# EAGLE board Board (EAGLE 9.6.2)
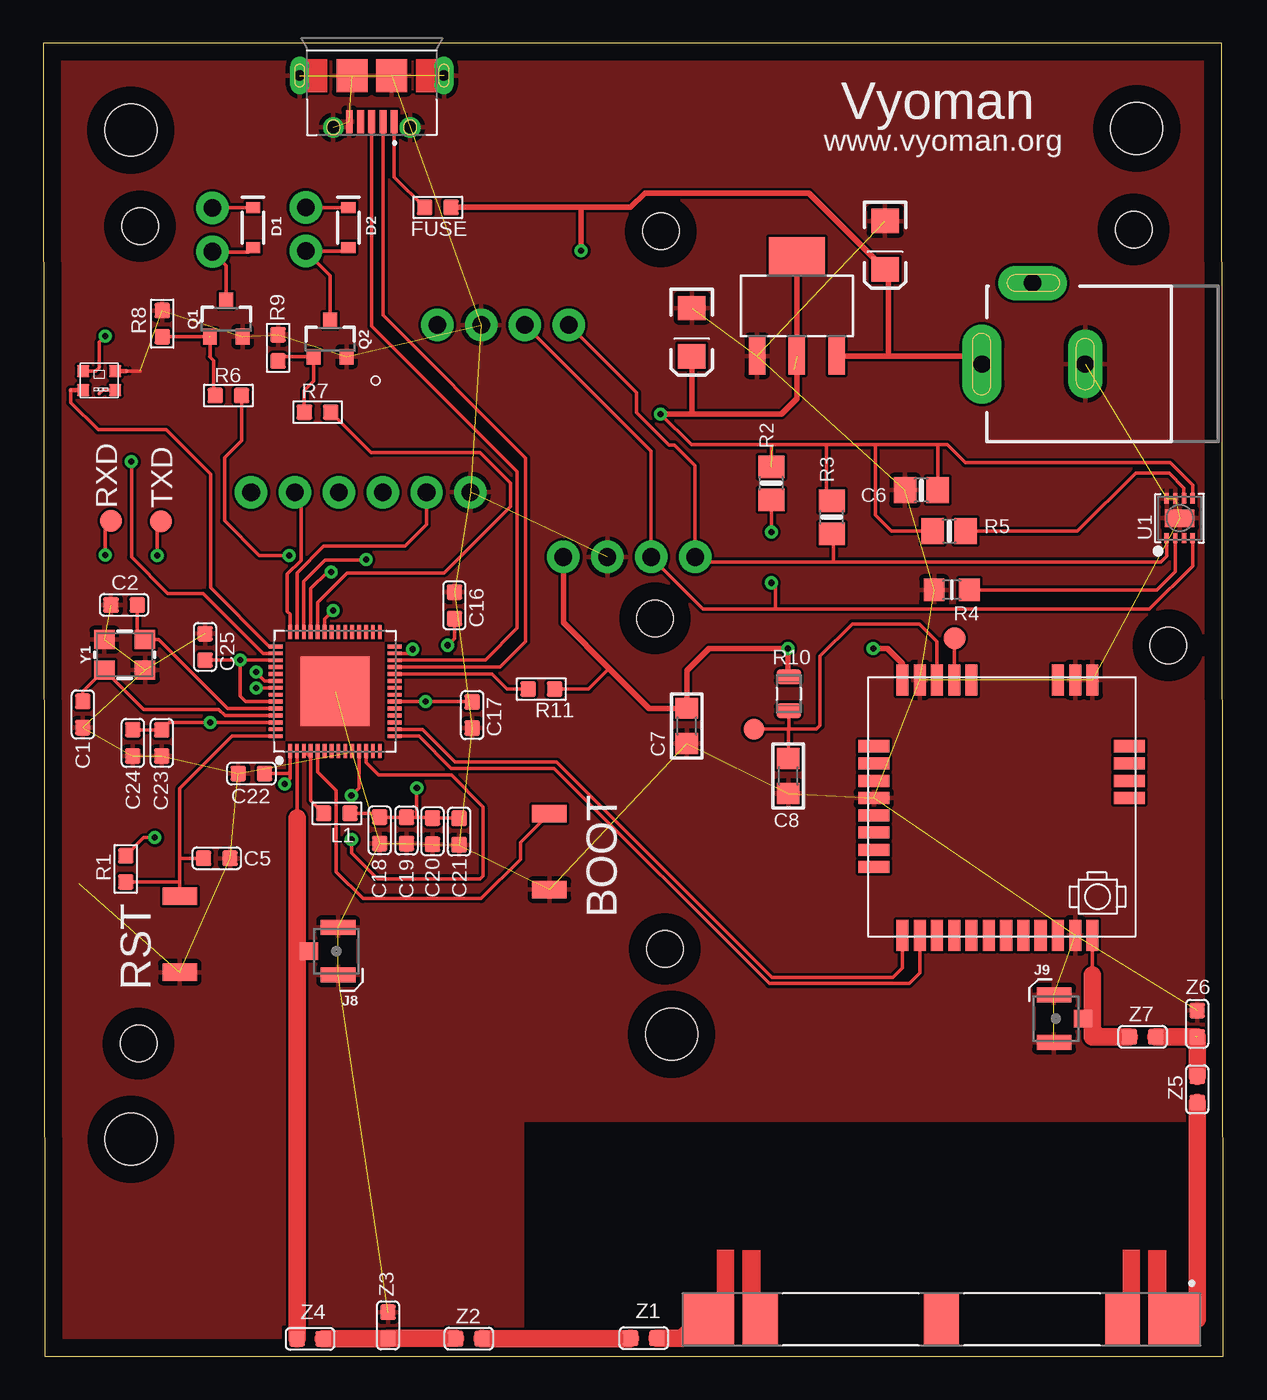
[diagram p0: board, top side]
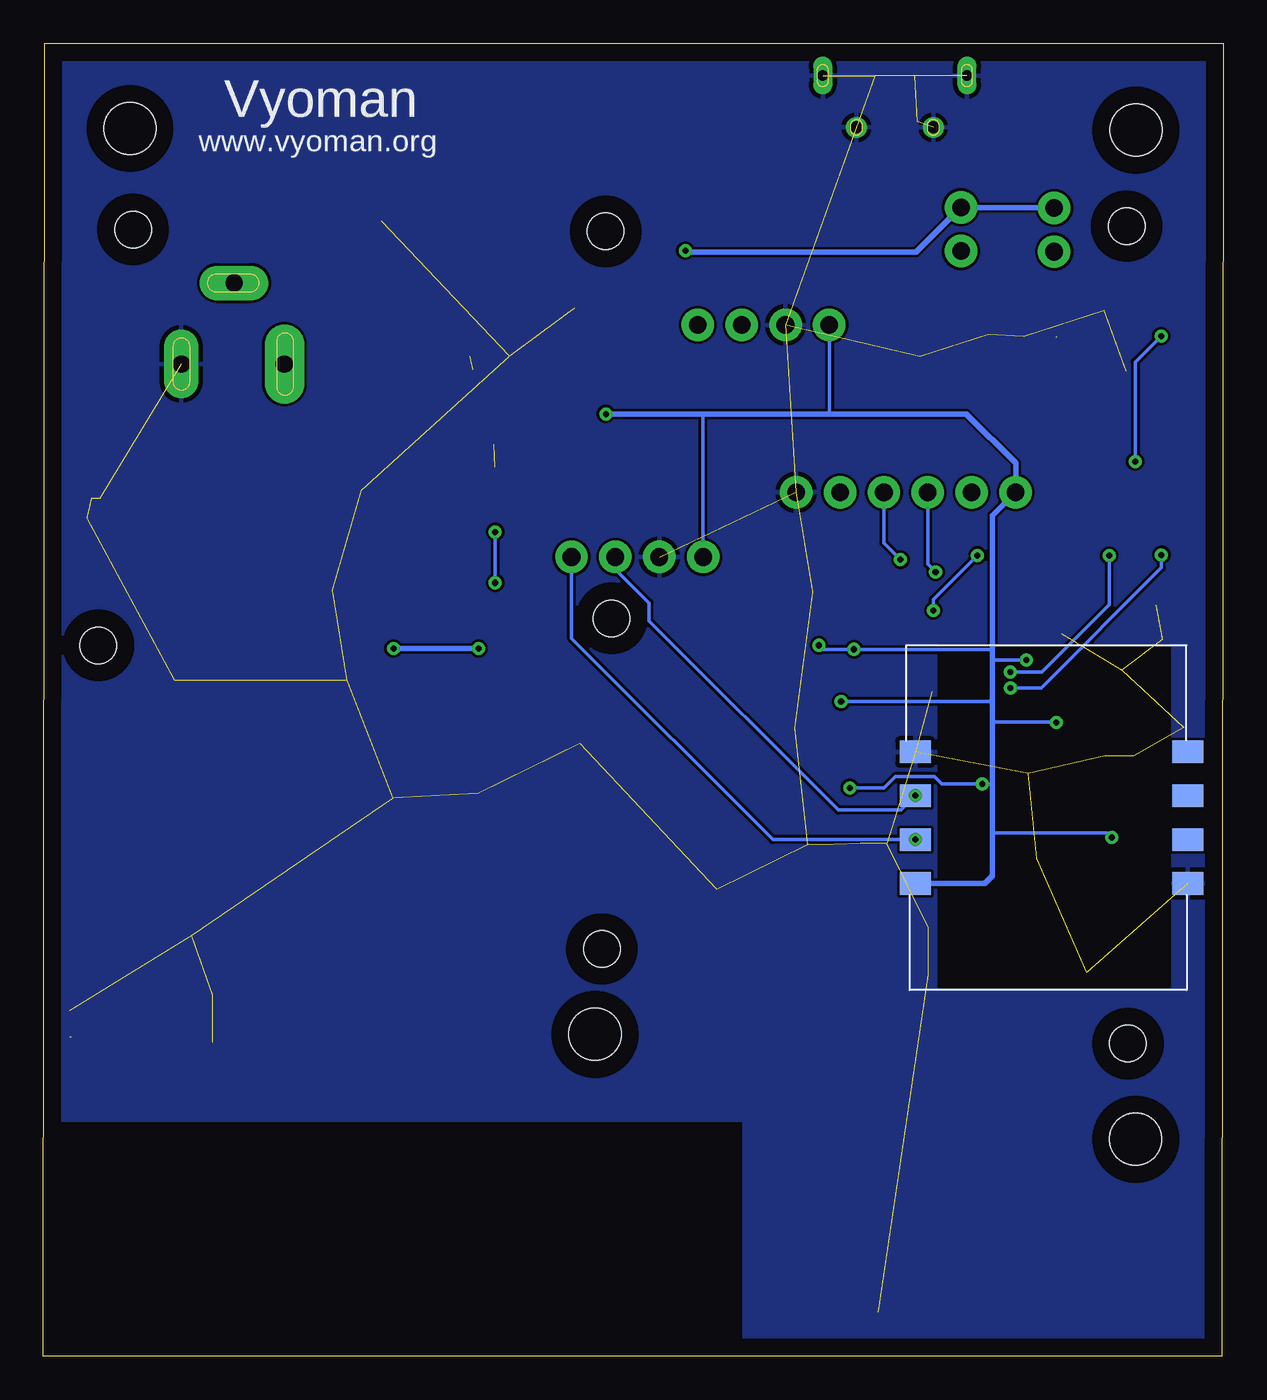
[diagram p1: board, bottom side, seen from below]

Size 68.35 x 76.04 mm. Coordinates in mm from the lower left corner, seen from the top.
Outline: 0.1,0 68.35,0 68.25,76.04 0,76.04 0.1,0
Copper layers (1*16): Top 0.035mm / dielectric 1.5mm / Bottom 0.035mm
Design rules "default": minimum track width 6mil, minimum drill 0.35mm, track to track 6mil, track to pad 6mil, pad to pad 6mil, via to via 6mil, smd to smd 6mil, copper to edge 40mil, drill to drill 6mil, minimum pad ring 10mil, minimum via ring 8mil, stop-mask expansion 4mil, vias tented up to drill 0mil, thermal gap 10mil
Net classes: 0 Default: width 0.203 mm; 2 3.3V: width 0.305 mm
Holes 3 mm at 5.08,12.57 36.39,18.65 5.07,71.01 63.33,71.11
Holes 2.1 mm at 5.53,18.12 63.15,65.26 5.61,65.45 35.77,65.15 35.43,42.73 36,23.59 65.16,41.18
tRestrict: area 13.9,0.4 to 16.7,1.7; area 23.3,0.4 to 26.1,1.7; area 66.2,14.1 to 67.5,16.9; area 62.3,17.9 to 65.1,19.1
bRestrict: area 3.1,21.4 to 16.5,41.2

## Footprints (pad centres in the part's own frame; a part is rotated, then mirrored left to right if it is on the bottom)
C0603 = smd 0.889 x 0.889: 1 -0.762,0; 2 0.762,0
EIA3216 = smd 1.4 x 1.6: A 1.4,0; C -1.4,0
0805-NO = smd 1.3 x 1.5: 1 -0.95,0; 2 0.95,0
C0805 = smd 1.2 x 1.3: 1 -1.016,0; 2 1.016,0
SOD-323 = smd 0.63 x 0.83: A 1.15,0; C -1.15,0
XCVR_NN03-310 = smd 3 x 3: 1_2 -13.5,0; 6_7 13.5,0 | smd 2 x 3: 3 -10.5,0; 4 0,0; 5 10.5,0
R0603 = smd 0.889 x 0.889: 1 -0.762,0; 2 0.762,0
SOT223 = smd 0.95 x 2.15: 1 -2.3,-2.9; 2 0,-2.9; 3 2.3,-2.9 | smd 3.25 x 2.15: 4 0,2.9
1X04_NO_SILK = drill 1.016 pad 1.88: 1 0,0; 2 2.54,0; 3 5.08,0; 4 7.62,0
MOLEX_47589-0001 = smd 0.4 x 1.35: 1 -1.3,1.938; 2 -0.65,1.938; 3 0,1.938; 4 0.65,1.938; 5 1.3,1.938 | drill 0.6 pad 0.95 long: S1 -4.175,-0.738; S4 4.175,-0.738 | smd 1.8 x 1.9: S2 -1.15,-0.738; S3 1.15,-0.738 | drill 0.7 pad 1.1: S5 -2.225,2.263; S6 2.225,2.263
POWER_JACK_PTH_SLOT = drill 1 pad 2 long: GND 0,0; GNDBREAK -3.048,4.699 | drill 1 pad 2.3 long: PWR -5.969,0
1X02_NO_SILK = drill 1.016 pad 1.88: 1 0,0; 2 2.54,0
1X06_NO_SILK = drill 1.016 pad 1.88: 1 0,0; 2 2.54,0; 3 5.08,0; 4 7.62,0; 5 10.16,0; 6 12.7,0
U.FL_REDUCED_FOOTPRINT = smd 2 x 0.85: 1 -0.1,1.375; 2 -0.1,-1.375 | smd 1.05 x 1: FEED 1.575,0
SOT23-3 = smd 0.8 x 0.9: 1 -0.95,-1; 2 0.95,-1; 3 0,1.1
_0805MP = smd 1.2 x 1.3: 1 -1.016,0; 2 1.016,0
RES_0805 = smd 0.87 x 1.42: 1 -0.975,0; 2 0.975,0
PAD.03X.05 = smd 1.27 x 1.27: P$1 0,0
TP12R = smd 1.2 x 1.2: TP 0,0
SHT3X = smd 0.6 x 0.25: 1 -1.15,0.75; 2 -1.15,0.25; 3 -1.15,-0.25; 4 -1.15,-0.75; 5 1.15,-0.75; 6 1.15,-0.25; 7 1.15,0.25; 8 1.15,0.75 | smd 1 x 1.7: THERMAL 0,0
LED-WS2812B-2020-RING = smd 0.127 x 0.127: + -17.655,-0.55; DI -16,0.75; DO -16.005,-0.75; GND -14.405,0.55 | smd 0.7 x 0.7: +1 -16.925,-0.55; DI1 -16.925,0.55; DO1 -15.075,-0.55; GND1 -15.075,0.55
TACTILE = smd 1 x 2: PINS1 1.82,1.437; PINS2 6.22,1.437
MAX30102 = smd 1.8 x 1.31: GND 1.27,10.16; GND1 17.06,2.54; INT 1.27,2.54; IRQ 1.27,5.08; RD 1.27,7.62; SCL 17.06,5.08; SDA 17.06,7.62; VIN 17.06,10.16
RAK3172 = smd 0.7 x 1.8: 1 13.5,14.945; 2 12.5,14.945; 3 11.5,14.945; 4 10.5,14.945; 5 9.5,14.945; 6 8.5,14.945; 7 7.5,14.945; 8 6.5,14.945; 9 5.5,14.945; 10 4.5,14.945; 11 3.5,14.945; 12 2.5,14.945; 17 2.5,0.145; 18 3.5,0.145; 19 4.5,0.145; 20 9.5,0.145; 21 10.5,0.145; 22 11.5,0.145; 23 12.5,0.145; 24 13.5,0.145 | smd 1.8 x 0.7: 13 0.365,6.99; 14 0.365,5.99; 15 0.365,4.99; 16 0.365,3.99; 25 15.165,3.99; 26 15.165,4.99; 27 15.165,5.99; 28 15.165,6.99; 29 15.165,7.99; 30 15.165,8.99; 31 15.165,9.99; 32 15.165,10.99
QFN40P700X700X90-57T400N = smd 0.81 x 0.22: 1 -3.445,2.6; 2 -3.445,2.2; 3 -3.445,1.8; 4 -3.445,1.4; 5 -3.445,1; 6 -3.445,0.6; 7 -3.445,0.2; 8 -3.445,-0.2; 9 -3.445,-0.6; 10 -3.445,-1; 11 -3.445,-1.4; 12 -3.445,-1.8; 13 -3.445,-2.2; 14 -3.445,-2.6; 29 3.445,-2.6; 30 3.445,-2.2; 31 3.445,-1.8; 32 3.445,-1.4; 33 3.445,-1; 34 3.445,-0.6; 35 3.445,-0.2; 36 3.445,0.2; 37 3.445,0.6; 38 3.445,1; 39 3.445,1.4; 40 3.445,1.8; 41 3.445,2.2; 42 3.445,2.6 | smd 0.22 x 0.81: 15 -2.6,-3.445; 16 -2.2,-3.445; 17 -1.8,-3.445; 18 -1.4,-3.445; 19 -1,-3.445; 20 -0.6,-3.445; 21 -0.2,-3.445; 22 0.2,-3.445; 23 0.6,-3.445; 24 1,-3.445; 25 1.4,-3.445; 26 1.8,-3.445; 27 2.2,-3.445; 28 2.6,-3.445; 43 2.6,3.445; 44 2.2,3.445; 45 1.8,3.445; 46 1.4,3.445; 47 1,3.445; 48 0.6,3.445; 49 0.2,3.445; 50 -0.2,3.445; 51 -0.6,3.445; 52 -1,3.445; 53 -1.4,3.445; 54 -1.8,3.445; 55 -2.2,3.445; 56 -2.6,3.445 | smd 4 x 4: 57 0,0
CRYSTAL-SMD-3.2X2.5MM = smd 1.2 x 1.1: 1 -1.175,-0.875; 2 1.175,-0.875; 3 1.175,0.875; 4 -1.175,0.875

## Placement (x,y rotation side)
C1  16pF  [C0603]  2.3,37.17 270 top
C2  16pF  [C0603]  4.69,43.52 0 top
C3  47uF  [EIA3216]  48.76,64.35 270 top
C4  47uF  [EIA3216]  37.57,59.31 270 top
C5  1uF  [C0603]  10.05,28.84 180 top
C6  10uF  [0805-NO]  50.86,50.16 180 top
C7  [C0805]  37.27,36.51 90 top
C8  [C0805]  43.15,33.61 90 top
C16  0.1uF  [C0603]  23.81,43.49 270 top
C17  1uF  [C0603]  24.85,37.14 90 top
C18  0.1uF  [C0603]  19.49,30.46 90 top
C19  0.1uF  [C0603]  21.04,30.45 90 top
C20  1uF  [C0603]  22.54,30.41 90 top
C21  10uF  [C0603]  24.09,30.39 90 top
C22  0.1uF  [C0603]  12.06,33.74 0 top
C23  1uF  [C0603]  6.87,35.52 90 top
C24  100pF  [C0603]  5.19,35.52 90 top
C25  0.1uF  [C0603]  9.37,41.08 270 top
D1  BAT760  [SOD-323]  12.16,65.36 270 top
D2  BAT760  [SOD-323]  17.68,65.36 270 top
E1  NN03-310  [XCVR_NN03-310]  52.02,2.14 180 top
FUSE  2.0K  [R0603]  22.85,66.53 0 top
IC1  LM1117MP-3.3  [SOT223]  43.65,60.83 0 top
J1  [1X04_NO_SILK]  22.82,59.72 0 top
J2  47589-0001  [MOLEX_47589-0001]  19.03,73.43 180 top
J3  POWER_JACKPOWER_JACK_SLOT  [POWER_JACK_PTH_SLOT]  60.34,57.46 0 top
J4  [1X04_NO_SILK]  30.13,46.29 0 top
J5  [1X02_NO_SILK]  9.8,63.97 90 top
J6  [1X02_NO_SILK]  15.2,64 90 top
J7  [1X06_NO_SILK]  12.04,50.04 0 top
J8  [U.FL_REDUCED_FOOTPRINT]  16.98,23.46 180 top
J9  [U.FL_REDUCED_FOOTPRINT]  58.64,19.56 0 top
L1  2.0nH  [R0603]  17.01,31.44 0 top
Q1  500mA/300V  [SOT23-3]  10.61,60.05 0 top
Q2  500mA/300V  [SOT23-3]  16.62,58.89 0 top
R1  10K  [R0603]  4.78,28.23 90 top
R2  10K  [0805-NO]  42.17,50.56 90 top
R3  10K  [0805-NO]  45.67,48.59 90 top
R4  10K  [_0805MP]  52.62,44.38 180 top
R5  10K  [0805-NO]  52.47,47.79 0 top
R6  10K  [R0603]  10.72,55.65 0 top
R7  10K  [R0603]  15.89,54.68 0 top
R8  10K  [R0603]  6.9,59.8 90 top
R9  10K  [R0603]  13.6,58.4 90 top
R10  CRCW08050000Z0EA  [RES_0805]  43.18,38.37 270 top
R11  10K  [R0603]  28.85,38.64 180 top
TP1  TEST-POINT3X5  [PAD.03X.05]  3.93,48.39 0 top
TP2  TEST-POINT3X5  [PAD.03X.05]  6.81,48.35 0 top
TP3  TEST-POINT3X5  [PAD.03X.05]  52.78,41.59 0 top
TP4  TPTP12R  [TP12R]  41.16,36.31 0 top
U1  SHT31-DIS  [SHT3X]  65.81,48.53 90 top
U4  LED-ADDRESSABLE16MM  [LED-WS2812B-2020-RING]  19.25,56.51 0 top
U$1  TACTILE  [TACTILE]  9.35,20.43 90 top
U$2  TACTILE  [TACTILE]  30.76,25.21 90 top
U$3  MAX30102_BREAKOUT  [MAX30102]  0.79,37.55 180 bottom
U$4  RAK3172HF  [RAK3172]  63.26,39.32 180 top
U$15  ESP32-S2QFN54  [QFN40P700X700X90-57T400N]  16.9,38.51 90 top
Y1  CRYSTAL-GROUNDEDSMD-3.2X2.5  [CRYSTAL-SMD-3.2X2.5MM]  4.72,40.63 0 top
Z1  0.1pF  [C0603]  34.79,1.06 0 top
Z2  0.7pF  [C0603]  24.65,1.03 0 top
Z3  4.9nH  [C0603]  19.97,1.79 90 top
Z4  0.2pF  [C0603]  15.46,1.01 180 top
Z5  11nH  [C0603]  66.84,15.46 90 top
Z6  5nH  [C0603]  66.83,19.26 270 top
Z7  3.9nH  [C0603]  63.67,18.5 0 top

## Library data of the parts
C1 C2 C5 C16-C25 FUSE L1 R1 R6-R9 R11 U$4 Z1-Z7 = RAK3172-Breakout
C3 C4 = SparkFun-Retired; PROD_ID: CAP-00811
C6 R2-R5 U1 = microbuilder
C7 C8 = rc-master-smd
D1 D2 = SparkFun-DiscreteSemi; PROD_ID: DIO-14072
E1 = NN03-310; AVAILABILITY: In Stock; DESCRIPTION: Multiport top performance chip antenna component for GSM, UMTS, LTE, 5G, GNSS, Bluetooth (617 - 960MHz, 1710 - 2690MHz, 3300 - 3800MHz, 1561 - 1606 MHz and 2400 - 2500 MHz), signal booster; MF: Ignion; MP: NN03-310; PACKAGE: None; PRICE: None; PURCHASE-URL: https://pricing.snapeda.com/search/part/NN03-310/?ref=eda
IC1 = lm1117_10; MF: Texas Instruments; MPN: LM1117MP-3.3; OC_FARNELL: 9778195; OC_NEWARK: 28X3416
J1 J4 = SparkFun-Connectors; PROD_ID: CONN-09696
J2 = 47589-0001; AVAILABILITY: In Stock; DESCRIPTION: USB - micro AB Receptacle Connector 5 Position Surface Mount, Right Angle; Through Hole; MF: Molex; MP: 47589-0001; PACKAGE: None; PRICE: None; PURCHASE-URL: https://pricing.snapeda.com/search/part/47589-0001/?ref=eda
J3 = SparkFun-Connectors; PROD_ID: CONN-08197
J5 J6 TP1-TP3 = SparkFun-Connectors
J7 = SparkFun-Connectors; PROD_ID: CONN-08437
J8 J9 = SparkFun-Connectors; PROD_ID: CONN-09193
Q1 Q2 = SparkFun-DiscreteSemi; PROD_ID: TRANS-09116
R10 = Resistor_Capacitor; CREATED_BY: PCBLayout.com; DIGIKEY_PART_NUMBER: 541-0.0ATR-ND; MANUFACTURER: Vishay Dale; MPN: CRCW08050000Z0EA; PACKAGE: SMD 0805
TP4 = testpad
U4 = ALBERT
U$1 U$2 = Tactile-3x6x4.3
U$3 = MAX30102 Breakout
U$15 = adafruit_wireless; DESCRIPTION: WiFi 802.11b/g/n Transceiver Module 2.4GHz Antenna Not Included Surface Mount; DIGI-KEY_PART_NUMBER: 1965-ESP32-S2CT-ND; MF: Espressif Systems; MP: ESP32-S2; PACKAGE: None; PURCHASE-URL: https://pricing.snapeda.com/search/part/ESP32-S2/?ref=eda
Y1 = SparkFun-Clocks

## Nets
3.3V: C4.A C6.1 C7.2 C16.2 C17.2 C18.2 C19.2 C20.2 C21.2 C22.2 C23.2 C24.2 C25.2 IC1.2 IC1.4 J1.1 J4.1 J7.1 L1.2 R1.2 R2.2 R3.2 R5.1 R10.1 R11.1 U1.5 U$3.VIN U$4.24 U$15.1 U$15.20 U$15.27 U$15.45 U$15.51 U$15.54
ADDR: R4.1 U1.2
ALERT: U1.3
BOOT: U$2.PINS2 U$15.5
CS: J7.2 U$15.42
D+: J2.3 U$15.26
D-: J2.2 U$15.25
GND: C1.2 C2.1 C3.C C4.C C5.1 C6.2 C7.1 C8.1 C16.1 C17.1 C18.1 C19.1 C20.1 C21.1 C22.1 C23.1 C24.1 C25.1 IC1.1 J1.2 J2.5 J2.S1 J2.S2 J2.S3 J2.S4 J2.S5 J2.S6 J3.GND J4.2 J7.6 J8.1 J8.2 J9.1 J9.2 Q1.2 Q2.2 R4.2 R8.2 R9.2 U1.7 U1.8 U1.THERMAL U4.GND U$1.PINS1 U$2.PINS1 U$3.GND U$3.GND1 U$4.11 U$4.17 U$4.18 U$4.23 U$4.28 U$15.57 Y1.2 Y1.4 Z3.2 Z6.1
ID: J2.4
IO33: R6.2 U$15.37
IO34: R7.2 U$15.38
LORA: C8.2 R10.2 TP4.TP U$4.22
LORA_ANT: J9.FEED U$4.12 Z7.1
LORA_RX: U$4.1 U$15.16
LORA_TX: U$4.2 U$15.15
MISO: J7.5 U$15.41
MOSI: J7.3 U$15.39
N$1: C2.2 U$15.52 Y1.3
N$2: C1.1 U$15.53 Y1.1
N$3: C5.2 R1.1 U$1.PINS2 U$15.56
N$4: L1.1 U$15.3 U$15.4
N$5: Q1.1 R6.1 R8.1
N$6: FUSE.1 J2.1
N$7: Q2.1 R7.1 R9.1
N$8: TP3.P$1 U$4.21
N$9: R11.2 U$15.24
N$10: Z1.1 Z2.2
N$11: D1.A J5.1 Q1.3
N$12: Z2.1 Z3.1 Z4.1
N$13: Z5.2 Z6.2 Z7.2
N$14: D2.A J6.1 Q2.3
NEO_POW: U4.+ U$15.43
NEOPIX: U4.DI U$15.44
PORT1: E1.6_7 Z1.2
PORT2: E1.1_2 Z5.1
RST: R5.2 U1.6
RXD: TP1.P$1 U$15.49
SCK: J7.4 U$15.40
SCL: J1.3 J4.3 R2.1 U1.4 U$3.SCL U$15.11
SDA: J1.4 J4.4 R3.1 U1.1 U$3.SDA U$15.12
SPICLK: U$15.34
SPICS0: U$15.33
SPID: U$15.36
SPIHD: U$15.31
SPIQ: U$15.35
SPIWP: U$15.32
TXD: TP2.P$1 U$15.48
VDD_SPI: U$15.30
VIN: C3.A D1.C D2.C FUSE.2 IC1.3 J3.PWR J5.2 J6.2
WIFI_ANT: J8.FEED U$15.2 Z4.2

## Tracks (layer width: path | path; a pad name or v marks a point on that pad's centre or on a via)
3.3V  (via drill 0.35)  (2 unrouted)
  Top 0.203: U$15.27 21.17,40.71 v21.39,40.94 | v23.43,41.18 23.81,41.56 C16.2 | C17.2 v22.14,37.91 U$15.20 | C18.2 19.5,31.21 C19.2 21.62,31.21 | 21.62,31.21 22.5,31.21 C20.2 24.06,31.17 C21.2 | L1.2 19.27,31.44 C18.2 | C22.2 14.18,33.74 14.3,33.86 | U$15.1 14.3,33.86 | 14.3,33.86 14.3,33.46 v13.97,33.14 | 19.63,31.36 C18.2 | C25.2 v11.4,40.32 v11.41,40.31 | U$15.45 v11.41,40.31 | U$15.54 v9.68,36.71 7.3,36.71 C23.2 C24.2 | U$15.51 11.73,37.91 11.4,38.25 11.4,40.3 v11.41,40.31 | R1.2 5.83,30.04 v6.47,30.04 | v35.76,54.57 37.55,52.79 42.24,52.79 | R2.2 42.17,52.78 45.35,52.78 | R3.2 45.35,49.86 45.35,52.78 | 45.35,52.78 | U1.5 66.57,50.44 65.27,51.74 53.4,51.74 52.36,52.78 51.74,52.78 | v21.64,32.92 21.64,31.23 21.62,31.21 | 45.35,52.78 48.26,52.78 | 48.26,52.78 51.74,52.78 | 51.74,52.78 51.81,52.71 C6.1 | R5.1 49.12,47.79 48.18,48.73 48.18,52.71 48.26,52.78 | R11.1 31.58,38.64 32.78,39.83
  Top 0.305: IC1.4 43.65,57.31 43.48,57.14 | IC1.2 43.65,55.46 42.76,54.57 37.53,54.57 | 37.53,54.57 v35.76,54.57 | C4.A 37.57,54.61 37.53,54.57 | U$4.24 49.76,40.11 48.88,40.99 v48.07,40.99 | J4.1 30.13,42.48 32.78,39.83 35.09,37.52 C7.2 | C7.2 37.31,37.56 | R10.1 43.13,39.4 v43.13,40.99 38.55,40.99 37.27,39.71 C7.2
  Bottom 0.203: 13.39,40.98 13.43,40.94 v21.39,40.94 23.2,40.94 v23.43,41.18 | 13.39,38.08 13.56,37.91 v22.14,37.91 | 13.39,33.13 13.96,33.13 v13.97,33.14 16.3,33.14 16.73,33.57 19,33.57 19.65,32.92 v21.64,32.92 | 13.39,40.21 13.28,40.32 v11.4,40.32 | 13.39,36.74 9.71,36.74 v9.68,36.71 | v6.47,30.04 6.74,30.31 13.39,30.31 | J1.1 22.82,54.58 22.82,54.57 | J4.1 30.13,54.42 29.98,54.57
  Bottom 0.305: v35.76,54.57 29.98,54.57 22.82,54.57 14.9,54.57 12.03,51.71 J7.1 13.39,48.69 13.39,40.98 13.39,40.21 13.39,38.08 13.39,36.74 13.39,33.13 13.39,30.31 13.39,27.82 13.82,27.39 U$3.VIN | v48.07,40.99 43.16,40.99 v43.13,40.99
ADDR
  Top 0.203: U1.2 65.57,45.45 64.5,44.38 R4.1
BOOT
  Top 0.203: U$2.PINS2 27.65,29.76 27.65,28.79 25.37,26.5 18.52,26.5 16.98,28.04 16.98,32.75 15.89,33.85 U$15.5
CS
  Top 0.203: U$15.42 14.3,42.98 14.14,43.13 14.14,45.31 14.93,46.09 14.93,49.7 J7.2
D+
  Top 0.203: U$15.26 25.61,40.31 27.46,42.16 27.46,51.23 19.03,59.66 J2.3
D-
  Top 0.203: U$15.25 26.46,39.91 27.95,41.4 27.95,52.01 19.68,60.28 J2.2
GND  (56 unrouted)
  Top 0.203: U4.GND 5.62,57.06
  pour Top: 0.03,76.01 0.03,0.01 27.75,0.01 27.75,13.66 68.22,13.66 68.22,76.01 0.03,76.01
  pour Bottom: 27.78,0.01 27.78,13.63 68.22,13.63 68.22,76.01 0.04,76.01 0.04,0.01
IO33  (via drill 0.35)
  Top 0.203: R6.2 11.49,53.04 10.5,52.05 10.5,48.39 12.51,46.38 v14.25,46.38 | U$15.37 16.3,42.69 v16.8,43.19
  Bottom 0.203: v16.8,43.19 16.8,43.83 v14.25,46.38
IO34
  Top 0.203: R7.2 19,52.33 25.29,52.33 27.06,50.56 27.06,49.22 23.21,45.37 17.61,45.37 15.9,43.66 U$15.38
LORA
  Top 0.203: U$4.22 51.76,41.38 50.74,42.41 46.86,42.41 44.99,40.54 44.99,36.53 44.78,36.31 43.16,36.31 | 43.16,36.31 TP4.TP | R10.2 43.18,36.33 43.16,36.31 | 43.16,36.31 43.15,36.3 C8.2
LORA_ANT
  Top 0.203: U$4.12 60.76,22.08 60.76,21.94 60.76,21.93
  Top 0.305: J9.FEED 60.39,19.38 60.71,19.38 61.59,18.5
  Top 1: Z7.1 61.59,18.5 60.76,18.5 60.76,22.08
LORA_RX
  Top 0.203: U$15.16 21.96,36.31 23.87,34.41 29.73,34.41 42.2,21.94 49.2,21.94 49.76,22.5 U$4.1
LORA_TX
  Top 0.203: U$15.15 21.77,35.91 23.63,34.05 29.58,34.05 42.05,21.58 50.16,21.58 50.76,22.19 U$4.2
MISO
  Top 0.203: U$15.41 14.7,45.36 16.25,46.92 20.96,46.92 22.2,48.16 J7.5
MOSI  (via drill 0.35)
  Top 0.203: U$15.39 15.5,44.45 16.46,45.42 v16.67,45.42
  Bottom 0.203: v16.67,45.42 17.12,45.87 J7.3
N$1
  Top 0.203: U$15.52 10.67,37.51 6.68,41.5 Y1.3 5.45,41.95 C2.2
N$2
  Top 0.203: U$15.53 10.53,37.11 10.17,37.47 5.83,37.47 Y1.1 2.3,38.51 C1.1
N$3
  Top 0.203: U$1.PINS2 7.92,27.45 | 7.92,27.45 7.92,28.8 | 7.92,28.8 7.92,32.9 10.93,35.91 U$15.56 | C5.2 7.96,28.84 7.92,28.8 | R1.1 7.9,27.46 7.92,27.45
N$4
  Top 0.203: U$15.4 15.5,34.67 | 15.5,34.67 15.5,32.19 L1.1 | U$15.3 15.5,34.67
N$5  (3 unrouted)
  Top 0.2: 9.65,59.04 Q1.1
  Top 0.203: 9.68,57.86 9.89,57.65 9.89,55.72 R6.1 | 9.68,57.86 9.66,57.88 | 9.68,59.03 9.68,57.86 | R8.1 9.64,59.04
N$6
  Top 0.203: J2.1 20.33,68.29 FUSE.1
N$7
  Top 0.203: R7.1 15.13,55.93 15.67,56.47 Q2.1 13.85,57.89 R9.1
N$8
  Top 0.203: U$4.21 52.76,41.57 TP3.P$1
N$9
  Top 0.203: U$15.24 25.98,39.51 26.86,38.64 R11.2
N$10
  Top 0.203: Z2.2
  Top 1: Z2.2 33.99,1.02 Z1.1
N$11
  Top 0.203: J5.1 9.83,63.94 | 9.83,63.94 10.61,63.16 Q1.3 | D1.A 11.89,63.94 9.83,63.94
N$12
  Top 0.203: 19.97,1.01 Z3.1 | Z2.1
  Top 1: Z4.1 Z3.1 | Z3.1 Z2.1
N$13  (1 unrouted)
  Top 1: Z7.2 66.73,18.5 | Z6.2 Z5.2
N$14
  Top 0.203: Q2.3 16.62,62.59 J6.1 17.48,64 D2.A
NEO_POW
  Top 0.203: U4.+ 1.59,55.24 3.18,53.65 7.14,53.65 9.69,51.1 9.69,44.51 13.09,41.11 U$15.43
NEOPIX  (via drill 0.35)
  Top 0.203: v5.11,51.81 v5.12,51.81 5.12,46.28 7.22,44.18 9.27,44.18 12.74,40.71 U$15.44 | U4.DI 3.25,58.72 v3.6,59.08
  Bottom 0.203: v3.6,59.08 5.11,57.58 v5.11,51.81
PORT1
  Top 0.203: 38.97,2.47 38.97,2.26 38.52,2.26 | 38.52,2.26 38.52,2.57 | 38.52,2.26 E1.6_7
  Top 1: Z1.2 37,1.06 38.52,2.57
PORT2
  Top 0.203: Z5.1 67.13,14.69 | 67.13,2.14 E1.1_2
  Top 1: Z5.1 66.84,2.14 E1.1_2
RST
  Top 0.203: R5.2 59.89,47.79 63.26,51.16 65.2,51.16 66.07,50.29 U1.6
RXD  (via drill 0.35)
  Top 0.203: U$15.49 v12.33,38.71 | v3.59,46.41 3.59,48.05 TP1.P$1
  Bottom 0.203: v12.33,38.71 10.55,38.71 3.59,45.68 v3.59,46.41
SCK  (via drill 0.35)
  Top 0.203: U$15.40 15.1,44.88 16.32,46.1 18.7,46.1 v18.7,46.13
  Bottom 0.203: v18.7,46.13 19.66,47.1 J7.4
SCL  (via drill 0.35)
  Top 0.2: v42.17,47.75 v42.17,47.74
  Top 0.203: U$3.SCL 18.3,32.91 U$15.11 | J1.3 35.21,52.41 J4.3 38.22,43.28 42.41,43.28 | U1.4 66.57,45.77 64.07,43.28 42.41,43.28 | v42.17,44.79 42.41,44.56 42.41,43.28 | R2.1 v42.17,47.75
  Bottom 0.2: v42.17,44.79
  Bottom 0.203: U$3.SCL 18.69,31.63 22.31,31.63 33.27,42.58 33.27,43.63 35.21,45.58 J4.3 | v42.17,47.74 v42.17,44.8 v42.17,44.79
  other vias: 17.85,32.47
SDA  (via drill 0.35)
  Top 0.2: R3.1 45.78,47.53
  Top 0.203: U$15.12 18.7,34.39 19.43,33.65 23.64,33.65 25.47,31.83 25.47,27.81 25.31,27.65 19.36,27.65 17.85,29.16 U$3.SDA | J1.4 34.37,55.8 34.37,54.65 36.25,52.77 36.56,52.77 37.75,51.57 J4.4 37.75,46.22 37.98,46 45.76,46 | U1.1 65.07,46.34 64.72,46 45.76,46 | R3.1 45.76,47.55 45.76,46
  Bottom 0.203: U$3.SDA 26.1,29.93 37.75,41.58 J4.4
  other vias: 17.85,29.93
TXD  (via drill 0.35)
  Top 0.203: U$15.48 12.84,39.11 v12.33,39.62 | v6.62,46.37 6.62,48.15 TP2.P$1
  Bottom 0.203: v12.33,39.62 10.51,39.62 6.62,43.52 v6.62,46.37
VIN  (via drill 0.35)
  Top 0.203: FUSE.2 31.15,66.53 34.1,66.53 34.88,67.31 44.39,67.31 | D1.C J5.2 | D2.C 15.24,66.51 J6.2
  Top 0.305: IC1.3 48.94,57.93 | 48.94,57.93 53.9,57.93 J3.PWR | 48.94,57.93 48.94,62.76 C3.A 44.39,67.31 44.34,67.36 34.86,67.36 34.03,66.53 FUSE.2 | v31.16,64.03 31.16,66.52 31.15,66.53
  Bottom 0.305: J5.2 15.17,66.51 J6.2 17.81,63.93 31.16,63.93 v31.16,64.03
WIFI_ANT
  Top 0.203: U$15.2 14.7,33.88 14.71,33.88 14.71,31.19
  Top 0.305: J8.FEED 15.24,23.3 14.71,23.3
  Top 1: Z4.2 14.71,1.01 14.71,23.3 14.71,31.19

## Text on the board
tPlace: Vyoman | www.vyoman.org | RXD | TXD | BOOT | RST
bPlace: Vyoman | www.vyoman.org